# Altium PCB Layout.PcbDoc
Units mil, origin at the board's own origin, x right, y up, seen from the top; angles counter-clockwise.
Board outline 3800 x 2250 mil, 2 copper layers (Top Layer, Bottom Layer); 29 components, 24 nets, 107 pads, 4 vias.
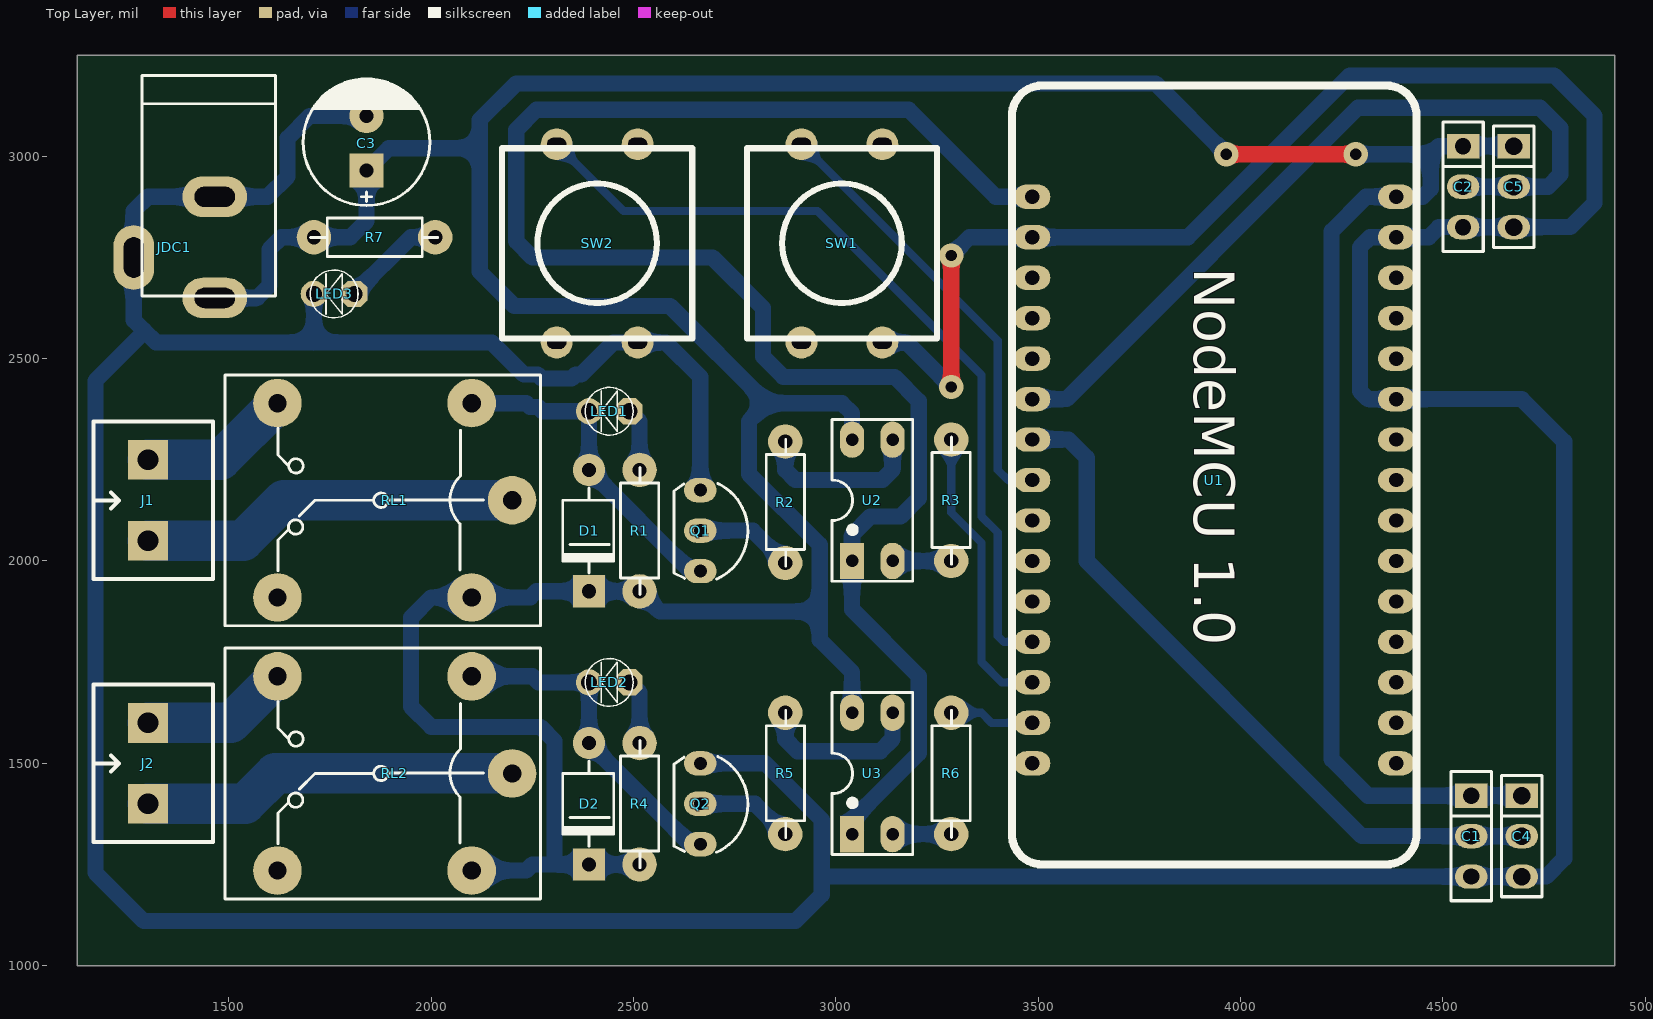
[diagram p0: Top Layer view]
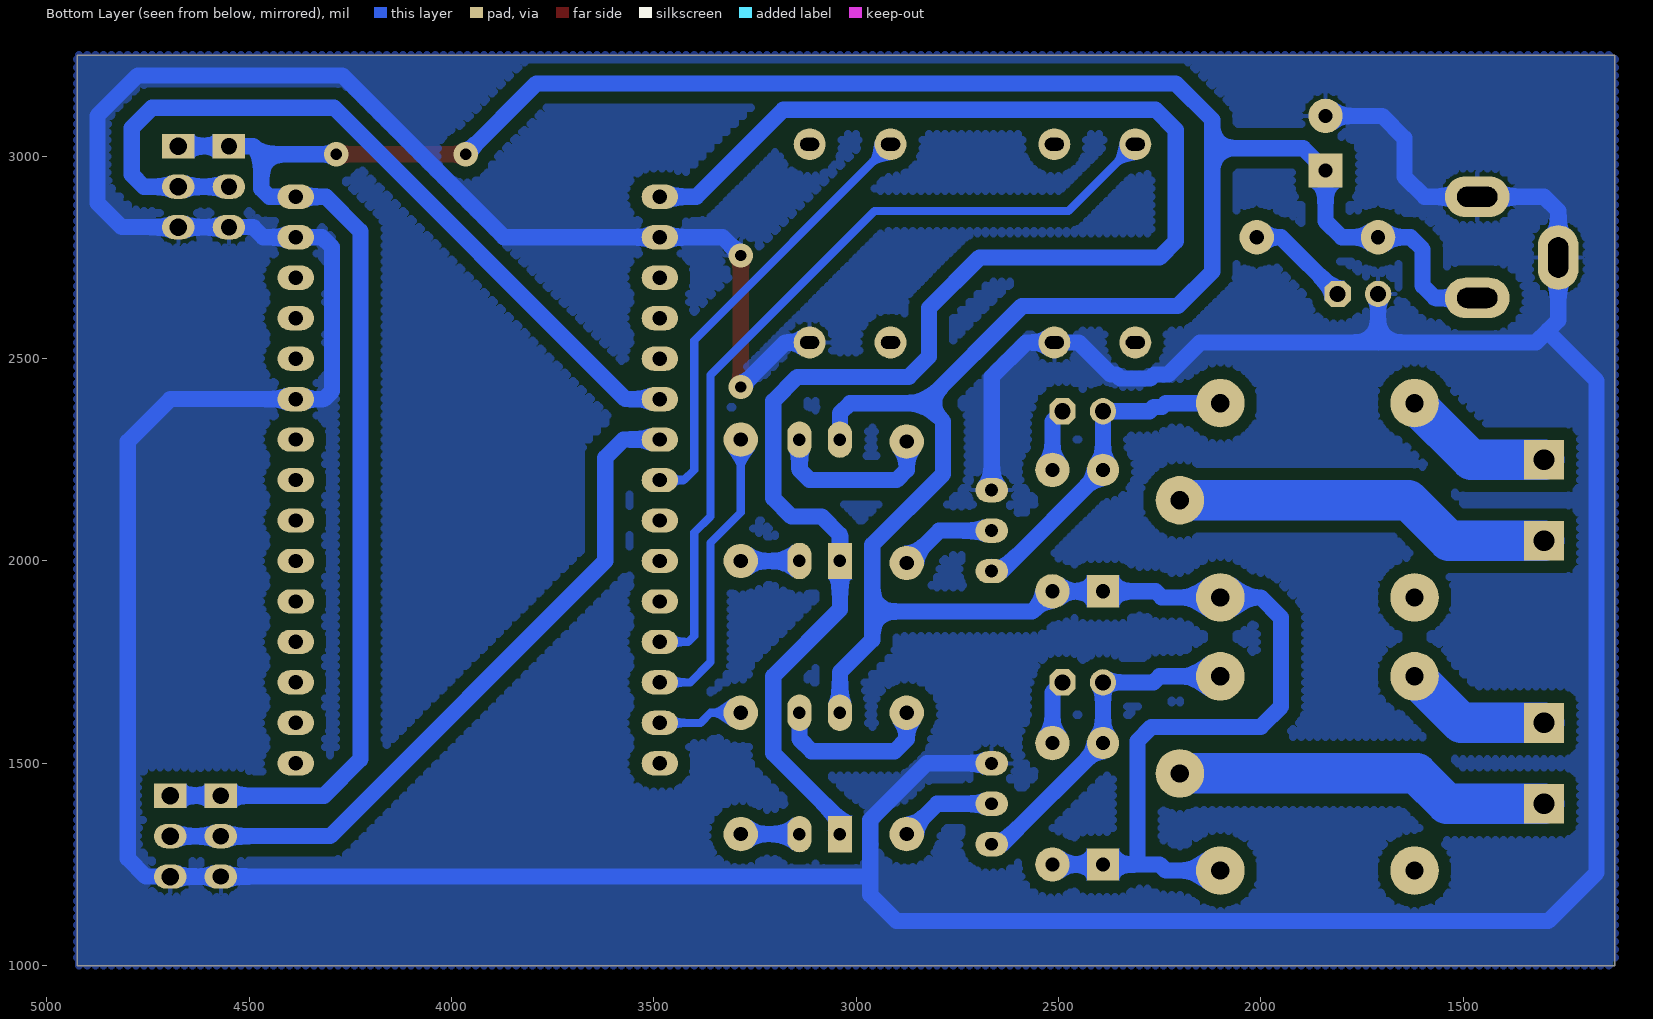
[diagram p1: Bottom Layer view, seen from below]
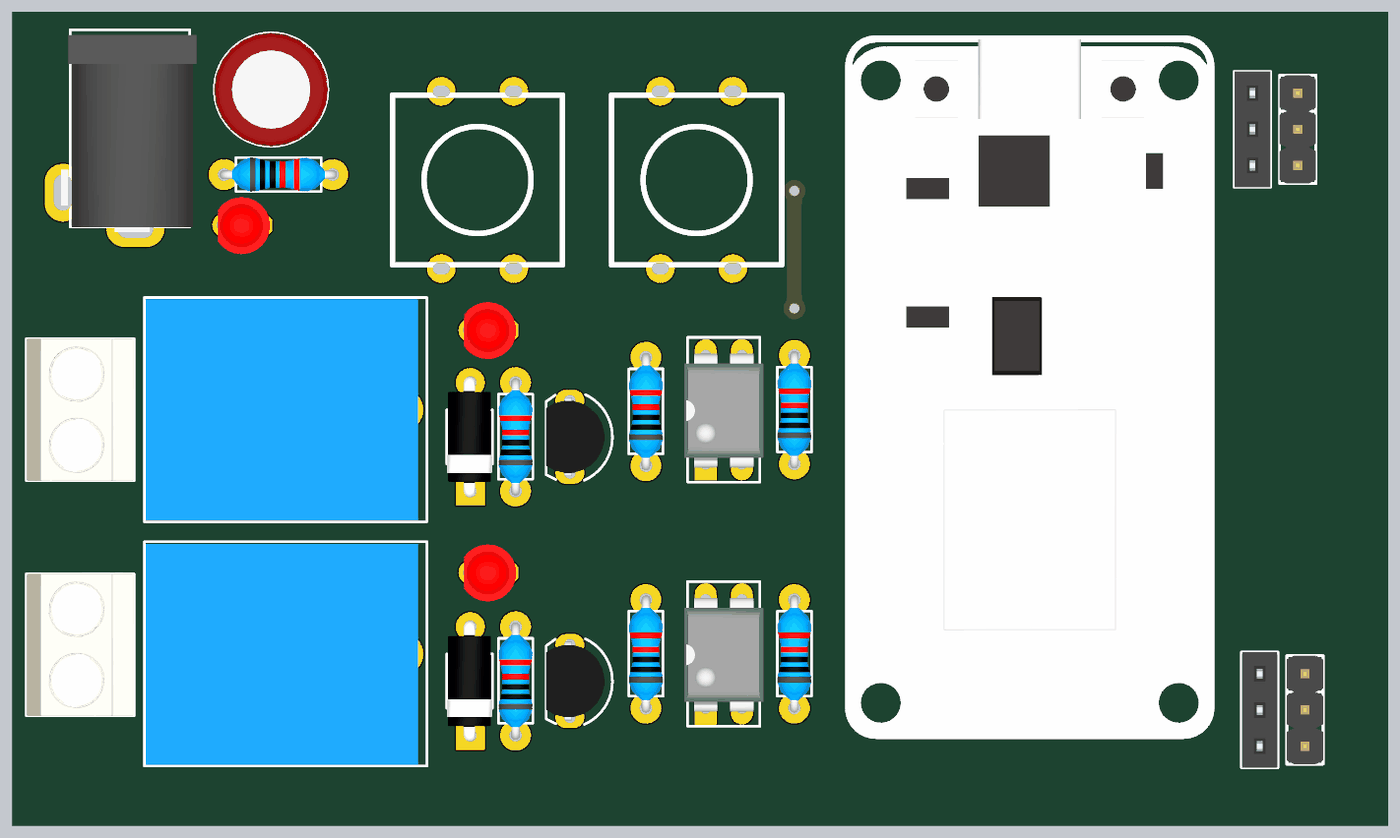
[diagram p2: 3D render of the assembled board from above, using the file's embedded part models]

## Layer stack, top to bottom
Top Solder: solder mask 0.4, Solder Resist, Dk 3.5
Top Layer: signal copper 1.4
Dielectric 1: dielectric 12.6, FR-4, Dk 4.8
Bottom Layer: signal copper 1.4
Bottom Solder: solder mask 0.4, Solder Resist, Dk 3.5

## Board outline
1125,1000 1125,3250 4925,3250 4925,1000

## Design rules (kind name [scope] priority, off if disabled: settings)
Clearance [All] p1: gap=30 ignorepadtopadclearanceinfootprint=FALSE
PolygonConnect [All] p1: connectstyle=Relief reliefconductorwidth=10 reliefentries=4 polygonreliefangle="90 Angle" airgapwidth=10
RoutingVias [All] p1: holewidth=28 width=50 viastyle="Through Hole" minholewidth=28 minwidth=50 maxholewidth=28 maxwidth=50
SolderMaskExpansion [All] p1: expansion=4
Width [All] p1: maxlimit=100 minlimit=15 preferedwidth=25
30 further rules are at their usual default settings.

## Components (designator, comment, footprint, x,y, rotation, side; value= is the part's Value field where it differs from the comment)
C1 "JP3" JP3-C1T 4570,1420 r270 top
C2 "JP3" JP3-C1T 4550,3025 r270 top
C3 "CP3" CE_8x12 1840,2965 r90 top value=100uF/50V
C4 "JP3" JP3-D1T 4695,1420 r270 top
C5 "JP3" JP3-D1T 4675,3025 r270 top
D1 "1N4007" DIO-1A-SMALL 2390,2275 r90 top
D2 "1N4007" DIO-1A-SMALL 2390,1600 r90 top
J1 "KF2" KF2-5.08 1300,2150 r90 top
J2 "KF2" KF2-5.08 1300,1500 r90 top
JDC1 "Jac DC" DC0 1365,2775 r270 top
LED1 "LED" LED-3MM-RED 2490,2370 r180 top value="LED 3 ly Single Colour"
LED2 "LED" LED-3MM-RED 2490,1700 r180 top value="LED 3 ly Single Colour"
LED3 "LED" LED-3MM-RED 1810,2660 r180 top value="LED 3 - 5 ly 2 Colour"
Q1 "2N3904" TO92-123 2665,2075 r270 top value=C1815
Q2 "2N3904" TO92-123 2665,1400 r270 top value=C1815
R1 "220" RES-1/4W-SMALL 2515,2065 r90 top value="R1/4W - 1K"
R2 "1k" RES-1/4W-SMALL 2875,2135 r90 top value="R1/4W - 1K"
R3 "100" RES-1/4W-SMALL 3285,2140 r90 top
R4 "220" RES-1/4W-SMALL 2515,1390 r90 top value="R1/4W - 1K"
R5 "1k" RES-1/4W-SMALL 2875,1465 r90 top value="R1/4W - 1K"
R6 "100" RES-1/4W-SMALL 3285,1465 r90 top
R7 "220" RES-1/4W-SMALL 1850,2800 r0 top
RL1 "Relay 10A/12V" "RELAY 5" 1875,2150 r180 top value="Relay SPDT, 10A, 12V"
RL2 "Relay 10A/12V" "RELAY 5" 1875,1475 r180 top value="Relay SPDT, 10A, 12V"
SW1 "SW" SW4-12x12x8 3015,2785 r0 top value="Button chip 4 pin"
SW2 "SW" SW4-12x12x8 2410,2785 r0 top value="Button chip 4 pin"
U1 "NodeMCU 1.0" NODEMCU-1.0 3485,2900 r0 top
U2 "TLP521-1" DIP4 3040,2000 r0 top value=TLP5211
U3 "TLP521-1" DIP4 3040,1325 r0 top value=TLP5211

## Footprints (in the part's own frame and the unit in brackets; to place one, negate y for a bottom-side part, rotate by r counter-clockwise, add the part's x,y. Pads: shape width x height; smd on the part's side, far side on the other; paste and mask are expansions set on the pad)
CE_8x12 [mil]
  rect 85x85 hole 35: 1(0,0)
  round 85 hole 35: 2(135,0)
  silkscreen extent -87,-157 227,157, body extent -87,-157 227,157, height 477
DC0 [mil] "Jac DC input"
  oval 100x160 hole 50 slot 100 at 90 deg: 1(125,100) 2(-125,100)
  oval 160x100 hole 50 slot 100 at 0 deg: 3(25,-100)
  silkscreen extent -425,-80 120,250, body extent -410,-105 134,269, height 434
DIO-1A-SMALL [mil] "Diode 1A, W 100mil, L 350mil"
  round 80 hole 35: 1(-50,0)
  rect 80x80 hole 35: 2(-350,0)
  silkscreen extent -305,-61 -95,65, body extent -366,-61 -34,65, height 122
DIP4 [mil]
  rect 60x90 hole 31: 1(0,0)
  oval 60x90 hole 31: 2(100,0) 3(100,300) 4(0,300)
  silkscreen extent -50,-50 150,350, body extent -59,-10 159,305, height 170
JP3-C1T [mil] "3 row, straight, gold plating"
  rect 60x80 hole 40.16: 1(0,0)
  oval 60x80 hole 40.16: 2(100,0) 3(200,0)
  silkscreen extent -60,-50 260,50, body extent -60,-49 260,49, height 335
JP3-D1T [mil] "3 pins, 1 row, straight, gold plating"
  rect 60x80 hole 43.31: 1(0,0)
  oval 60x80 hole 43.31: 2(100,0) 3(200,0)
  silkscreen extent -50,-50 250,50, body extent -50,-50 250,50, height 336
KF2-5.08 [mm]
  rect 2.5x2.5 hole 1.3: 1(-2.54,0) 2(2.54,0)
  silkscreen extent -4.95,-4.08 4.95,3.43, body extent -5,-4.07 5,3.43, height 10
LED-3MM-RED [mil]
  oct 65x65 hole 40: 1(0,0)
  round 65 hole 40: 2(100,0)
  silkscreen extent -9,-59 109,59, body extent -27,-77 117,80, height 181
NODEMCU-1.0 [mil]
  oval 90x60 hole 35.43: 1(0,0) 2(0,-100) 3(0,-200) 4(0,-300) 5(0,-400) 6(0,-500) 7(0,-600) 8(0,-700) 9(0,-800) 10(0,-900) 11(0,-1000) 12(0,-1100) 13(0,-1200) 14(0,-1300) 15(0,-1400) 16(900,-1400) 17(900,-1300) 18(900,-1200) 19(900,-1100) 20(900,-1000) 21(900,-900) 22(900,-800) 23(900,-700) 24(900,-600) 25(900,-500) 26(900,-400) 27(900,-300) 28(900,-200) 29(900,-100) 30(900,0)
  silkscreen extent -50,-1650 950,275, body extent -56,-1655 956,274, height 338
"RELAY 5" [mil] "Reley DPDT, 8 pin, 1A, W400mil, L800mil,H 300mil"
  round 120 hole 45: 1(-325,0) 2(255,240) 3(255,-240) 4(-225,-240) 5(-225,240)
  silkscreen extent -395,-310 385,310, body extent -371,-304 381,306, height 602
RES-1/4W-SMALL [mil]
  round 85 hole 35: 1(-140,0) 2(160,0)
  silkscreen extent -148,-47 166,47, body extent -152,-47 172,47, height 97
SW4-12x12x8 [mm]
  round 2 hole 0.8 slot 1.2 at 0 deg: 1(-2.54,6.223) 2(-2.54,-6.223) 3(2.54,-6.223) 4(2.54,6.223)
  silkscreen extent -5.97,-5.97 5.97,5.97, body extent -6,-6.93 6,6.93, height 8.5
TO92-123 [mil] "TO-92"
  oval 60x80 hole 32: 1(-100,0) 2(0,0) 3(100,0)
  silkscreen extent -117,-65 120,118, body extent -109,-66 109,95, height 245

## Part data
C1 C2 C4 C5: "WR-PHD 2.54 mm Angled Socket Header", Manufacturer="Würth Elektronik eiSos GmbH", partNo=613003143121, ComponentLink1 Description=Manufacturer, ComponentLink1URL=http://www.we-online.com, ComponentLink2 Description=Datasheet, ComponentLink2URL=http://katalog.we-online.de/em/datasheet/6130xx143121.pdf, Created by="Karrer Zheng", Created Date="29 March 2013", NoPins=03
C3: "Cap P  470uF/16V - 100uF?35V", Description 1="1000uF/6,3V - 470uF/16V - 330uF - 25V", Description 2="220uF/35V - 100uF/50V - 63V - 4,7uF/200V", Description 3="22uF => 33uF100V - 3,3uF => 4,7uF/250V", Description 4="2,2uF =>3,3uF/350 - 2,2uF/400V - 1uF/450V"
D1 D2: library part D1A, "Diode 1A"
J1 J2: Manufacturer="Würth Elektronik eiSos GmbH", partNo=691103110002, ComponentLink1 Description=Manufacturer, ComponentLink1URL=http://www.we-online.com, ComponentLink2 Description=Datasheet, ComponentLink2URL=http://katalog.we-online.de/em/datasheet/6911031100xx.pdf, Created by="Karrer Zheng", Created Date="29 October 2013", NoPins=2
JDC1: library part DCIN, "Jac DC input"
LED1 LED2: "LED Single colour Green and Red"
LED3: library part "LED SMD"
Q1 Q2: library part 2N904, "NPN 600mW, ECB", =C2383
R1 R2 R4 R5: library part R, "Resistor 1/4W"
R3 R6 R7: library part Res-SMD, "Resistor", Manufacturer="Generic Components", Class=Passive, Published=08/06/2000, Publisher="Altium Hobart Technology Centre"
RL1 RL2: library part "Relay 5", "Relay SPDT,10A - 12VDC 5 Pin", ="Relay SPDT, 10A, 24V"
SW1 SW2: library part SW4, "Switch button 4 pin"
U2 U3: "Single Opto"

## Via types
v1: diameter 60, hole 28, Top Layer to Bottom Layer, tented both sides, 4 vias

## Nets (pads, with @x,y where several pads share a name; then routed paths per layer and width w, separated by ;. In a path a pad name is that pad's centre, name@x,y a point inside that pad or via, vN(x,y) a via of type N, cw(c..) or ccw(c..) an arc to the next point about the centre after c; other vN are vias at no path point)
3V3: U1.1 U2.1 U3.1 | length 4207.6
  Bottom Layer w40: U3.1 3040,1360 3205,1525 3205,1715 3040,1880 U2.1 3040,2065 3085,2110 3160,2110 3205,2155 3205,2395 3145,2455 2870,2455 2820,2505 2820,2625 2695,2750 2250,2750 2210,2790 2210,3065 2260,3115 3180,3115 3395,2900 U1.1
BUT1: SW2.1 U1.12 | length 2038.9
  Bottom Layer w20: SW2.1 2475,2865 2955,2865 3360,2460 3360,2110 3400,2070 3400,1815 3415,1800 U1.12
BUT2: SW1.1 U1.8 | length 1101.2
  Bottom Layer w20: SW1.1 3400,2545 3400,2225 3425,2200 U1.8
GND: C1.3 C2.3 C3.2 C4.3 C5.3 JDC1.2 JDC1.3 LED3.2 Q1.1 Q2.1 SW1.3 SW2.3 U1.2 U1.25 U1.29 | length 13728.7
  Top Layer w40: v1(3285,2430) v1(3285,2755)
  Bottom Layer w40: LED3.2 1710,2540 ; C3.2 1700,3100 1645,3045 1645,2950 1595,2900 JDC1.2 1300,2900 1265,2865 JDC1.3 1265,2595 1290,2570 ; Q2.1 2825,1500 2965,1360 2965,1225 ; Q1.1 2665,2455 2580,2540 SW2.3 2450,2540 2370.87,2460.87 2357.26,2460.87 2347.02,2450.63 2272.98,2450.63 2262.74,2460.87 2229.13,2460.87 2150,2540 1710,2540 ; SW1.3 3175,2540 v1(3285,2430) ; v1(3285,2755) 3330,2800 U1.2 3870,2800 4270,3200 4775,3200 4875,3100 4875,2885 4815,2825 C5.3 C2.3 4490,2825 4465,2800 U1.29 4320,2800 4295,2775 4295,2420 4315,2400 U1.25 4695,2400 4800,2295 4800,1265 4755,1220 C4.3 C1.3 2970,1220 2965,1225 ; 1290,2570 1290,2565 1170,2445 1170,1230 1290,1110 2900,1110 2965,1175 2965,1225 ; 1290,2570 1320,2540 1710,2540
NetD1_1: D1.1 LED1.2 Q1.3 RL1.4 | length 821.8
  Bottom Layer w40: RL1.4 2234.62,2390 2243.99,2380.63 2264.37,2380.63 2275,2370 LED1.2 D1.1 2640,1975 Q1.3
NetD2_1: D2.1 LED2.2 Q2.3 RL2.4 | length 824.8
  Bottom Layer w40: RL2.4 2250,1715 2265,1700 LED2.2 D2.1 2640,1300 Q2.3
NetJ1_1: J1.1 RL1.1 | length 941.4
  Bottom Layer w100: J1.1 1535,2050 1635,2150 RL1.1
NetJ1_2: J1.2 RL1.3 | length 378
  Bottom Layer w100: J1.2 1480,2250 RL1.3
NetJ2_1: J2.1 RL2.1 | length 931.1
  Bottom Layer w100: J2.1 1540,1400 1615,1475 RL2.1
NetJ2_2: J2.2 RL2.3 | length 367.6
  Bottom Layer w100: J2.2 1505,1600 RL2.3
NetLED1_1: LED1.1 R1.2 | length 155.4
  Bottom Layer w40: LED1.1 2515,2345 R1.2
NetLED2_1: LED2.1 R4.2 | length 160.4
  Bottom Layer w40: LED2.1 2515,1675 R4.2
NetLED3_1: LED3.1 R7.2 | length 258
  Bottom Layer w40: LED3.1 1950,2800 R7.2
NetQ1_2: Q1.2 R2.1 | length 243.1
  Bottom Layer w40: Q1.2 2795,2075 R2.1
NetQ2_2: Q2.2 R5.1 | length 241.1
  Bottom Layer w40: Q2.2 2800,1400 R5.1
NetR2_2: R2.2 U2.3 | length 430.7
  Bottom Layer w40: R2.2 2875,2225 2900,2200 3115,2200 3140,2225 U2.3
NetR3_1: R3.1 U2.2 | length 145
  Bottom Layer w40: U2.2 R3.1
NetR5_2: R5.2 U3.3 | length 419.9
  Bottom Layer w40: R5.2 2875,1560 2905,1530 3110,1530 3140,1560 U3.3
NetR6_1: R6.1 U3.2 | length 152.1
  Bottom Layer w40: U3.2 R6.1 R6.1@3290,1330
RL1: R3.2 U1.13 | length 726.8
  Bottom Layer w20: R3.2 3285,2120 3360,2045 3360,1750 3410,1700 U1.13
RL2: R6.2 U1.14 | length 210.4
  Bottom Layer w20: R6.2 3360,1625 3385,1600 U1.14
SEN1: C1.2 C4.2 U1.7 | length 1765.3
  Bottom Layer w40: U1.7 3575,2300 3620,2255 3620,2000 4300,1320 C1.2 C4.2
SEN2: C2.2 C5.2 U1.6 | length 1991.4
  Bottom Layer w40: U1.6 3570,2400 4290,3120 4740,3120 4790,3070 4790,2955 4760,2925 C5.2 C2.2
VCC: C1.1 C2.1 C3.1 C4.1 C5.1 D1.2 D2.2 JDC1.1 R1.1 R4.1 R7.1 RL1.5 RL2.5 U1.30 U2.4 U3.4 | length 10583.4
  Top Layer w40: v1(3965,3005) v1(4285,3005)
  Bottom Layer w40: JDC1.1 1570,2650 1600,2680 1600,2770 1630,2800 R7.1 1800,2800 1840,2840 C3.1 1895,3020 2120,3020 ; RL2.5 2235,1235 2250,1250 2310,1250 ; R4.1 D2.2 2310,1250 ; U3.4 3040,1725 2960,1805 2960,1875 ; U2.4 3040,2365 3015,2390 2830,2390 ; v1(3965,3005) 3790,3180 2210,3180 2120,3090 2120,3020 ; v1(4285,3005) 4470,3005 ; C5.1 C2.1 4490,3025 4470,3005 ; C4.1 C1.1 4315,1420 4225,1510 4225,2815 4310,2900 U1.30 4450,2900 4470,2920 4470,3005 ; 2120,3020 2120,2715 2205,2630 2590,2630 2830,2390 ; 2310,1250 2305,1255 2305,1555 2270,1590 2000,1590 1950,1640 1950,1860 2000,1910 RL1.5 2245,1910 2260,1925 D1.2 R1.1 2565,1875 2960,1875 ; 2830,2390 2785,2345 2785,2215 2960,2040 2960,1875
pads on no net: RL1.2 RL2.2 SW1.2 SW1.4 SW2.2 SW2.4 U1.3 U1.4 U1.5 U1.9 U1.10 U1.11 U1.15 U1.16 U1.17 U1.18 U1.19 U1.20 U1.21 U1.22 U1.23 U1.24 U1.26 U1.27 U1.28

## Polygon pours and split planes (outlines as drawn)
GND on Bottom Layer "GND" (hatched 90Degree grid 0 track 20, pour order 8): 1125,3250 4925,3250 4925,1000 1125,1000

## Silkscreen, mask and mechanical layers (free items; w line width, h text height)
Mechanical 1:
  the board outline again, w20